# Altium PCB FOS 00_01_00_01 Rev 1_4.PcbDoc
Units mm, origin at the board's own origin, x right, y up, seen from the top; angles counter-clockwise.
Board outline 194.8 x 15.3 mm, 2 copper layers (Top Layer, Bottom Layer); 34 components, 29 nets, 88 pads, 12 vias.
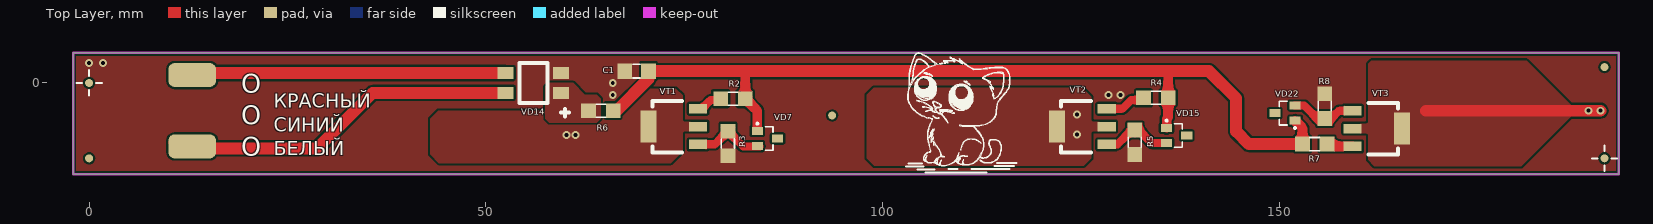
[diagram p0: Top Layer view]
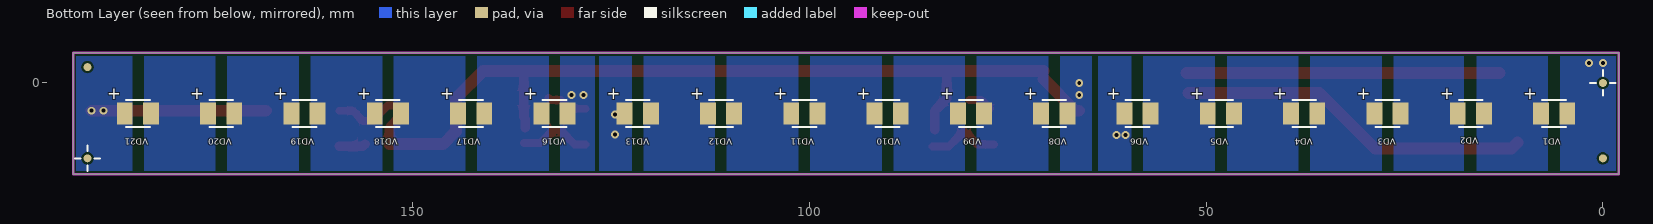
[diagram p1: Bottom Layer view, seen from below]
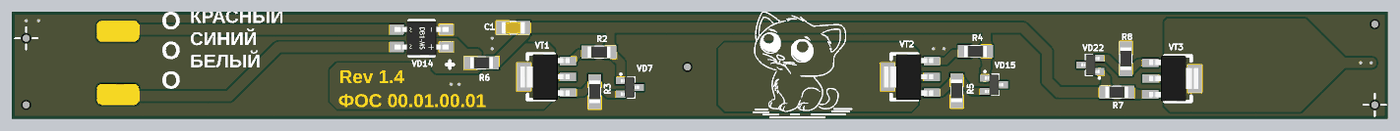
[diagram p2: 3D render of the assembled board from above, using the file's embedded part models]
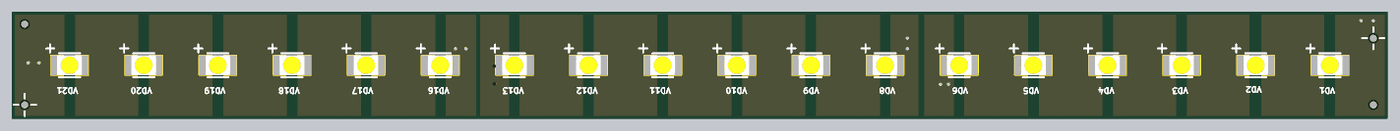
[diagram p3: 3D render of the assembled board from below, using the file's embedded part models]

## Layer stack, top to bottom
Top Solder: solder mask 0.0102, Solder Resist, Dk 3.5
Top Layer: signal copper 0.0356
Dielectric 1: dielectric 0.32, FR-4, Dk 4.8
Bottom Layer: signal copper 0.0356
Bottom Solder: solder mask 0.0102, Solder Resist, Dk 3.5

## Board outline
-2,-11.5 192.8,-11.5 192.8,3.8 -2,3.8

## Design rules (kind name [scope] priority, off if disabled: settings)
Clearance [All] p1: gap=0.254 ignorepadtopadclearanceinfootprint=FALSE except(0: Arc-Hole Track-Hole SMDPad-Hole THPad-Hole Via-Hole Fill-Hole Poly-Hole Region-Hole Text-Hole)
PolygonConnect [All] p1: thpad.connectstyle=Relief thpad.reliefconductorwidth=0.254 thpad.reliefentries=4 thpad.polygonreliefangle="90 Angle" thpad.airgapwidth=0.254 smdpad.connectstyle=Direct smdpad.reliefconductorwidth=0.254 smdpad.reliefentries=4 smdpad.polygonreliefangle="90 Angle" smdpad.airgapwidth=0.254 via.connectstyle=Direct via.reliefconductorwidth=0.254 via.reliefentries=4 via.polygonreliefangle="90 Angle" via.airgapwidth=0.254
RoutingVias [All] p1: holewidth=0.711 width=1.27 viastyle="Through Hole" minholewidth=0.711 minwidth=1.27 maxholewidth=0.711 maxwidth=1.27
SolderMaskExpansion [All] p1: expansion=0.102
Width [All] p1: maxlimit=5 minlimit=0.254 preferedwidth=0.254
30 further rules are at their usual default settings.

## Components (designator, comment, footprint, x,y, rotation, side; value= is the part's Value field where it differs from the comment)
C1 "Capacitor" CAP1206 69,1.5 r0 top value="1 uF"
R2 "Resistor" RES1206 81.15,-1.975 r0 top value="20 Om"
R3 "Resistor" RES1206 80.525,-7.625 r90 top value="10 kOm"
R4 "Resistor" RES1206 134.45,-1.875 r0 top value="10 Om"
R5 "Resistor" RES1206 131.8,-7.475 r90 top value="10 kOm"
R6 "Resistor" RES1206 64.5,-3.5 r180 top value="33 Om"
R7 "Resistor" RES1206 154.475,-7.7 r180 top value="10 Om"
R8 "Resistor" RES1206 155.75,-2.925 r270 top value="10 kOm"
VD1 "LED" LED_SAKURA 6.15,-3.85 r180 bottom
VD2 "LED" LED_SAKURA 16.65,-3.85 r180 bottom
VD3 "LED" LED_SAKURA 27.15,-3.85 r180 bottom
VD4 "LED" LED_SAKURA 37.65,-3.85 r180 bottom
VD5 "LED" LED_SAKURA 48.15,-3.85 r180 bottom
VD6 "LED" LED_SAKURA 58.65,-3.85 r180 bottom
VD7 "BAV23S" "SOT 23" 85.5,-7 r0 top
VD8 "LED" LED_SAKURA 69.15,-3.85 r180 bottom
VD9 "LED" LED_SAKURA 79.65,-3.85 r180 bottom
VD10 "LED" LED_SAKURA 90.15,-3.85 r180 bottom
VD11 "LED" LED_SAKURA 100.65,-3.85 r180 bottom
VD12 "LED" LED_SAKURA 111.15,-3.85 r180 bottom
VD13 "LED" LED_SAKURA 121.65,-3.85 r180 bottom
VD14 "Diode Bridge" DB-1MS 56,0 r270 top value=B1S
VD15 "BAV23S" "SOT 23" 137.075,-6.625 r0 top
VD16 "LED" LED_SAKURA 132.15,-3.85 r180 bottom
VD17 "LED" LED_SAKURA 142.65,-3.85 r180 bottom
VD18 "LED" LED_SAKURA 153.15,-3.85 r180 bottom
VD19 "LED" LED_SAKURA 163.65,-3.85 r180 bottom
VD20 "LED" LED_SAKURA 174.15,-3.85 r180 bottom
VD21 "LED" LED_SAKURA 184.65,-3.85 r180 bottom
VD22 "BAV23S" "SOT 23" 150.725,-3.8 r180 top
VT1 "PNP" SOT223 73.5,-5.5 r90 top value=BCP53
VT2 "PNP" SOT223 125,-5.5 r90 top value=BCP53
VT3 "PNP" SOT223 162.5,-5.75 r270 top value=BCP53
? "Comment" cat 109.35,-2.475 r0 top

## Footprints (in the part's own frame and the unit in brackets; to place one, negate y for a bottom-side part, rotate by r counter-clockwise, add the part's x,y. Pads: shape width x height; smd on the part's side, far side on the other; paste and mask are expansions set on the pad)
CAP1206 [mm]
  rect 1.85x1.95 smd: 1(-1.5,0) 2(1.5,0)
  silkscreen extent -0.45,-0.87 0.45,0.87, body extent -1.65,-0.85 1.65,0.85, height 1.5
cat [mm]
  silkscreen extent -6.36,-8.78 7.55,6.25
DB-1MS [mm]
  rect 1.5x2 smd: 1(1.25,3.5) 2(-1.25,3.5) 3(-1.25,-3.5) 4(1.25,-3.5)
  silkscreen extent -2.5,-1.75 4.25,4.5, body extent -2.45,-3.8 2.45,3.8, height 2.9
LED_SAKURA [mm]
  rect 2x2.8 smd: 1(1.651,0) 2(-1.651,0)
  silkscreen extent -1.5,-1.7 1.5,1.7, body extent -1.78,-1.4 1.78,1.4, height 0.7
RES1206 [mm] "Chip Resistor, 2-Leads, Body 3,20x1,60mm, IPC Medium Density"
  rect 1.85x1.85 smd: 1(-1.55,0) 2(1.55,0)
  silkscreen extent -0.6,-0.82 0.6,0.82, body extent -1.6,-0.8 1.6,0.8, height 0.6
SOT223 [mm]
  rect 1.2x2.3 smd: 1(-2.25,-3.25) 2(0,-3.25) 3(2.25,-3.25)
  rect 4x2 smd: 4(0,3)
  silkscreen extent -3.25,-1.25 3.25,2.5, body extent -3.25,-3.48 3.25,3.48, height 1.7
"SOT 23" [mm] "SOT23, 3-Leads, Body 2,90x2,45mm, Pitch 0,95mm, IPC Medium Density"
  rect 1.4x1 smd: 1(-1.275,0.95) 2(-1.275,-0.95) 3(1.275,0)
  silkscreen extent -1.4,-1.5 0.7,2, body extent -1.3,-1.5 1.3,1.5, height 1.1

## Free pads (board coordinates)
  rrect50% 6x3 smd paste-3: 1(13,-8) 1(13,1)
  round 1 smd far side mask+0.2: 2(0,-9.5) 2(0,0) 2(191,-9.5) 2(191,2)
  round 1 smd mask+0.2: 2(0,-9.5) 2(0,0) 2(93.65,-4.1) 2(191,-9.5) 2(191,2)

## Via types
v1: diameter 1, hole 0.5, Top Layer to Bottom Layer, tented both sides, 12 vias

## Nets (pads, with @x,y where several pads share a name; then routed paths per layer and width w, separated by ;. In a path a pad name is that pad's centre, name@x,y a point inside that pad or via, vN(x,y) a via of type N, cw(c..) or ccw(c..) an arc to the next point about the centre after c; other vN are vias at no path point)
GND: C1.1 R3.1 R5.1 R8.1 VD1.1 VD8.1 VD14.2 VD16.1
  other v1: 66,-1.5 128.5,-1.5 130,-1.5 66,0 0,2.5 1.75,2.5
NetC1_2: C1.2 R2.2 R4.2 R6.1 R7.2 VD7.1 VD15.1 VD22.1 | length 114.6
  Top Layer w0.254: 70.5,0.5 C1.2
  Top Layer w1.2: 82.7,1.3 R2.2 84.225,-3.5 VD7.1@84.225,-5.894 ; VD15.1 135.8,-4.5 136,-4.3 R4.2 136,1.225 136.275,1.5 ; VD22.1 152.925,-5.675 R7.2
  Top Layer w1.5: R6.1 66.5,-3.5 70.5,0.5 ; C1.2 82.9,1.5 ; 82.7,1.3 82.9,1.5 ; R7.2 146.175,-7.7 144.575,-6.1 144.575,-1.925 141.15,1.5 136.275,1.5 82.9,1.5
NetR1_1: VD1.2 VD2.1
NetR1_2: VD2.2 VD3.1
NetR2_1: R2.1 VT1.3 | length 3
  Top Layer w1: VT1.3@77.275,-3.225 78.35,-2.15 R2.1@79.825,-2.15
NetR3_2: R3.2 VD7.2 VT1.1 | length 9.2
  Top Layer w1: VT1.1 78.85,-7.75 R3.2 82.45,-8 VD7.2@84.5,-8
NetR4_1: R4.1 VT2.3 | length 5.2
  Top Layer w1: VT2.3 130.25,-3.25 131.35,-2.15 132.625,-2.15 R4.1
NetR5_2: R5.2 VD15.2 VT2.1 | length 9.2
  Top Layer w1: VT2.1 129.6,-7.75 131.425,-5.925 R5.2 132.275,-5.925 133.925,-7.575 VD15.2 VD15.2@136,-7.575
NetR6_2: R6.2 VD14.1
NetR7_1: R7.1 VT3.3 | length 3.3
  Top Layer w1.2: R7.1 156.325,-8 VT3.3
NetR8_2: R8.2 VD22.2 VT3.1 | length 8.6
  Top Layer w1: VD22.2 153.15,-2.85 155.1,-4.8 156.25,-4.8 157.55,-3.5 VT3.1
NetVD3_2: VD3.2 VD4.1
NetVD4_2: VD4.2 VD5.1
NetVD5_2: VD5.2 VD6.1
NetVD6_2: VD6.2 VT1.2 VT1.4
  other v1: 61.3,-6.575 60.175,-6.55
NetVD8_2: VD8.2 VD9.1
NetVD9_2: VD9.2 VD10.1
NetVD10_2: VD10.2 VD11.1
NetVD11_2: VD11.2 VD12.1
NetVD12_2: VD12.2 VD13.1
NetVD13_2: VD13.2 VT2.2 VT2.4
  other v1: 124.5,-6.5 124.5,-4
NetVD16_2: VD16.2 VD17.1
NetVD17_2: VD17.2 VD18.1
NetVD18_2: VD18.2 VD19.1
NetVD19_2: VD19.2 VD20.1
NetVD20_2: VD20.2 VD21.1
NetVD21_2: VD21.2 VT3.2 VT3.4 | length 22
  Top Layer w1.5: 168.5,-3.5 v1(189,-3.5) v1(190.5,-3.5)
POWER1: pad.1@13,1 VD14.3 | length 39.5
  Top Layer w1.5: pad.1@13,1.25 VD14.3
POWER2: pad.1@13,-8 VD14.4 | length 44.7
  Top Layer w1.5: pad.1@10.75,-7.5 11.5,-8.25 28.75,-8.25 35.75,-1.25 VD14.4@52.25,-1.25
pads on no net: VD7.3 VD15.3 VD22.3

## Polygon pours and split planes (outlines as drawn)
NetVD19_2 on Bottom Layer "Bottom Layer-No Net 1" (solid, remove dead copper, pour order 88): 164.375,3.8 173.4,3.8 173.4,-11.5 164.375,-11.5
NetR1_2 on Bottom Layer "Bottom Layer-No Net 1" (solid, remove dead copper, pour order 96): 17.525,3.8 26.375,3.8 26.375,-11.5 17.525,-11.5
NetVD21_2 on Bottom Layer "Bottom Layer-No Net 1" (solid, remove dead copper, pour order 92): 185.375,3.8 192.8,3.8 192.8,-11.5 185.375,-11.5
NetVD20_2 on Bottom Layer "Bottom Layer-No Net 1" (solid, remove dead copper, pour order 90): 174.925,3.8 183.875,3.8 183.875,-11.5 174.925,-11.5
NetVD18_2 on Bottom Layer "Bottom Layer-No Net 1" (solid, remove dead copper, pour order 86): 153.875,3.8 162.875,3.8 162.875,-11.5 153.875,-11.5
NetVD17_2 on Bottom Layer "Bottom Layer-No Net 1" (solid, remove dead copper, pour order 84): 143.4,3.8 152.375,3.8 152.375,-11.5 143.4,-11.5
NetVD16_2 on Bottom Layer "Bottom Layer-No Net 1" (solid, remove dead copper, pour order 82): 132.875,3.8 141.9,3.8 141.9,-11.5 132.875,-11.5
GND on Bottom Layer "Bottom Layer-No Net 1" (solid, remove dead copper, pour order 80): 127.075,3.8 131.4,3.8 131.4,-11.5 127.075,-11.5
NetVD13_2 on Bottom Layer "Bottom Layer-No Net 1" (solid, remove dead copper, pour order 78): 122.4,3.8 126.5,3.8 126.5,-11.5 122.4,-11.5
NetVD12_2 on Bottom Layer "Bottom Layer-No Net 1" (solid, remove dead copper, pour order 76): 111.925,3.8 120.9,3.8 120.9,-11.5 111.925,-11.5
NetVD11_2 on Bottom Layer "Bottom Layer-No Net 1" (solid, remove dead copper, pour order 74): 101.4,3.8 110.4,3.8 110.4,-11.5 101.4,-11.5
NetVD10_2 on Bottom Layer "Bottom Layer-No Net 1" (solid, remove dead copper, pour order 72): 90.9,3.8 99.9,3.8 99.9,-11.5 90.9,-11.5
NetVD9_2 on Bottom Layer "Bottom Layer-No Net 1" (solid, remove dead copper, pour order 70): 80.425,3.8 89.375,3.8 89.375,-11.5 80.425,-11.5
NetVD8_2 on Bottom Layer "Bottom Layer-No Net 1" (solid, remove dead copper, pour order 68): 69.9,3.8 78.9,3.8 78.9,-11.5 69.9,-11.5
GND on Bottom Layer "Bottom Layer-No Net 1" (solid, remove dead copper, pour order 66): 68.4,3.8 64.4,3.8 64.4,-11.5 68.4,-11.5
NetVD6_2 on Bottom Layer "Bottom Layer-No Net 1" (solid, remove dead copper, pour order 64): 59.425,3.8 63.6,3.8 63.6,-11.5 59.425,-11.5
NetVD5_2 on Bottom Layer "Bottom Layer-No Net 1" (solid, remove dead copper, pour order 62): 48.925,3.801 57.925,3.801 57.925,-11.499 48.925,-11.499
NetVD4_2 on Bottom Layer "Bottom Layer-No Net 1" (solid, remove dead copper, pour order 60): 38.4,3.801 47.375,3.801 47.375,-11.499 38.4,-11.499
NetVD3_2 on Bottom Layer "Bottom Layer-No Net 1" (solid, remove dead copper, pour order 58): 27.9,3.8 36.875,3.8 36.875,-11.5 27.9,-11.5
GND on Bottom Layer "Bottom Layer-No Net 1" (solid, remove dead copper, pour order 56): 5.4,3.8 -2,3.8 -2,-11.5 5.4,-11.5
NetR1_1 on Bottom Layer "Bottom Layer-No Net 1" (solid, remove dead copper, pour order 94): 6.925,3.8 15.9,3.8 15.9,-11.5 6.925,-11.5
GND on Top Layer "Bottom Layer-No Net 1" (solid, remove dead copper, pour order 112): -1.962,-11.487 -1.987,-11.462 -1.987,3.813 192.813,3.813 192.813,-11.487
NetVD13_2 on Top Layer "Bottom Layer-No Net 1" (solid, remove dead copper, pour order 106): 98,-1.5 98.874,-0.625 125.175,-0.625 126.3,-1.75 126.3,-4.7 126.5,-4.9 127.3,-4.9 127.3,-6.1 126.5,-6.1 126.3,-6.3 126.3,-9.5 125.35,-10.45 98.95,-10.45 98,-9.5
NetR6_2 on Top Layer "Bottom Layer-No Net 1" (solid, remove dead copper, pour order 102): 58,0 61,0 62.5,-1.5 64,-1.5 64.5,-2 64.5,-4.5 64,-5 58,-5 57.5,-4.5 57.5,-0.5
NetVD21_2 on Top Layer "Bottom Layer-No Net 1" (solid, remove dead copper, pour order 100): 187,-3.998 180.509,-10.5 162,-10.5 161.2,-9.7 161.2,-6.55 161,-6.35 160.2,-6.35 160.2,-5.15 161,-5.15 161.2,-4.95 161.2,2.4 161.625,2.825 181.175,2.825 187,-3
NetVD6_2 on Top Layer "Bottom Layer-No Net 1" (solid, remove dead copper, pour order 108): 65.425,-5.508 70.2,-0.725 73.95,-0.725 74.8,-1.575 74.8,-4.7 75,-4.9 75.8,-4.9 75.8,-6.1 75,-6.1 74.8,-6.3 74.8,-8.6 73.3,-10.1 66.3,-10.1 65.425,-9.225
NetVD6_2 on Top Layer "Bottom Layer-No Net 1" (solid, remove dead copper, pour order 110): 66.55,-10.1 44.1,-10.1 43,-9 43,-4.5 44,-3.5 66.55,-3.5

## Keep-outs
Keep-Out Layer:
  the board outline again, w0.3

## Silkscreen, mask and mechanical layers (free items; w line width, h text height)
Top Overlay:
  rectangle: 104.775,-1.569 106.614,-0.925
  rectangle: 105.711,-1.112 106.604,-0.683
  rectangle: 109,-2.83 109.816,-2.15
  rectangle: 109.947,-3.015 111.045,-2.096
  lines w0.254: -1.6,0 -0.9,0 ; 0,-1.6 0,-0.9 ; 0,0.9 0,1.6 ; 0.9,0 1.6,0 ; 189.4,-9.5 190.1,-9.5 ; 191,-11.1 191,-10.4 ; 191,-8.6 191,-7.9 ; 191.9,-9.5 192.6,-9.5
  text "КРАСНЫЙ / СИНИЙ / БЕЛЫЙ" at 23.25,-9.75 h3
  text "О / О / О" at 19.2,-10.025 h4
Bottom Overlay:
  lines w0.254: -1.6,0 -0.9,0 ; 0,-1.6 0,-0.9 ; 0,0.9 0,1.6 ; 0.9,0 1.6,0 ; 189.4,-9.5 190.1,-9.5 ; 191,-11.1 191,-10.4 ; 191,-8.6 191,-7.9 ; 191.9,-9.5 192.6,-9.5
Top Solder:
  text "Rev 1.4" at 44.3,-6.4 h3
  text "ФОС 00.01.00.01" at 44.2,-9.8 h3
Mechanical 4:
  lines w0.05: -2.225,-3.85 1.375,-3.85 192.975,-3.85 ; 6.15,-5.575 6.15,-2.125 ; 16.65,-5.575 16.65,-2.125 ; 27.15,-5.575 27.15,-2.125 ; 37.65,-5.575 37.65,-2.125 ; 48.15,-5.575 48.15,-2.125 ; 58.65,-5.575 58.65,-2.125 ; 69.15,-5.575 69.15,-2.125 ; 79.65,-5.575 79.65,-2.125 ; 90.15,-5.575 90.15,-2.125 ; 100.65,-5.575 100.65,-2.125 ; 111.15,-5.575 111.15,-2.125 ; 121.65,-5.575 121.65,-2.125 ; 132.15,-5.575 132.15,-2.125 ; 142.65,-5.575 142.65,-2.125 ; 153.15,-5.575 153.15,-2.125 ; 163.65,-5.575 163.65,-2.125 ; 174.15,-5.575 174.15,-2.125 ; 184.65,-5.575 184.65,-2.125

## Text inside footprints (layer, text, board x,y; h text height)
VD1: Bottom Overlay "+" at 10.025,-2.05 h1.52
VD2: Bottom Overlay "+" at 20.525,-2.05 h1.52
VD3: Bottom Overlay "+" at 31.025,-2.05 h1.52
VD4: Bottom Overlay "+" at 41.525,-2.05 h1.52
VD5: Bottom Overlay "+" at 52.025,-2.05 h1.52
VD6: Bottom Overlay "+" at 62.525,-2.05 h1.52
VD8: Bottom Overlay "+" at 73.025,-2.05 h1.52
VD9: Bottom Overlay "+" at 83.525,-2.05 h1.52
VD10: Bottom Overlay "+" at 94.025,-2.05 h1.52
VD11: Bottom Overlay "+" at 104.525,-2.05 h1.52
VD12: Bottom Overlay "+" at 115.025,-2.05 h1.52
VD13: Bottom Overlay "+" at 125.525,-2.05 h1.52
VD16: Bottom Overlay "+" at 136.025,-2.05 h1.52
VD17: Bottom Overlay "+" at 146.525,-2.05 h1.52
VD18: Bottom Overlay "+" at 157.025,-2.05 h1.52
VD19: Bottom Overlay "+" at 167.525,-2.05 h1.52
VD20: Bottom Overlay "+" at 178.025,-2.05 h1.52
VD21: Bottom Overlay "+" at 188.525,-2.05 h1.52